# EAGLE board narsil (EAGLE 6.1)
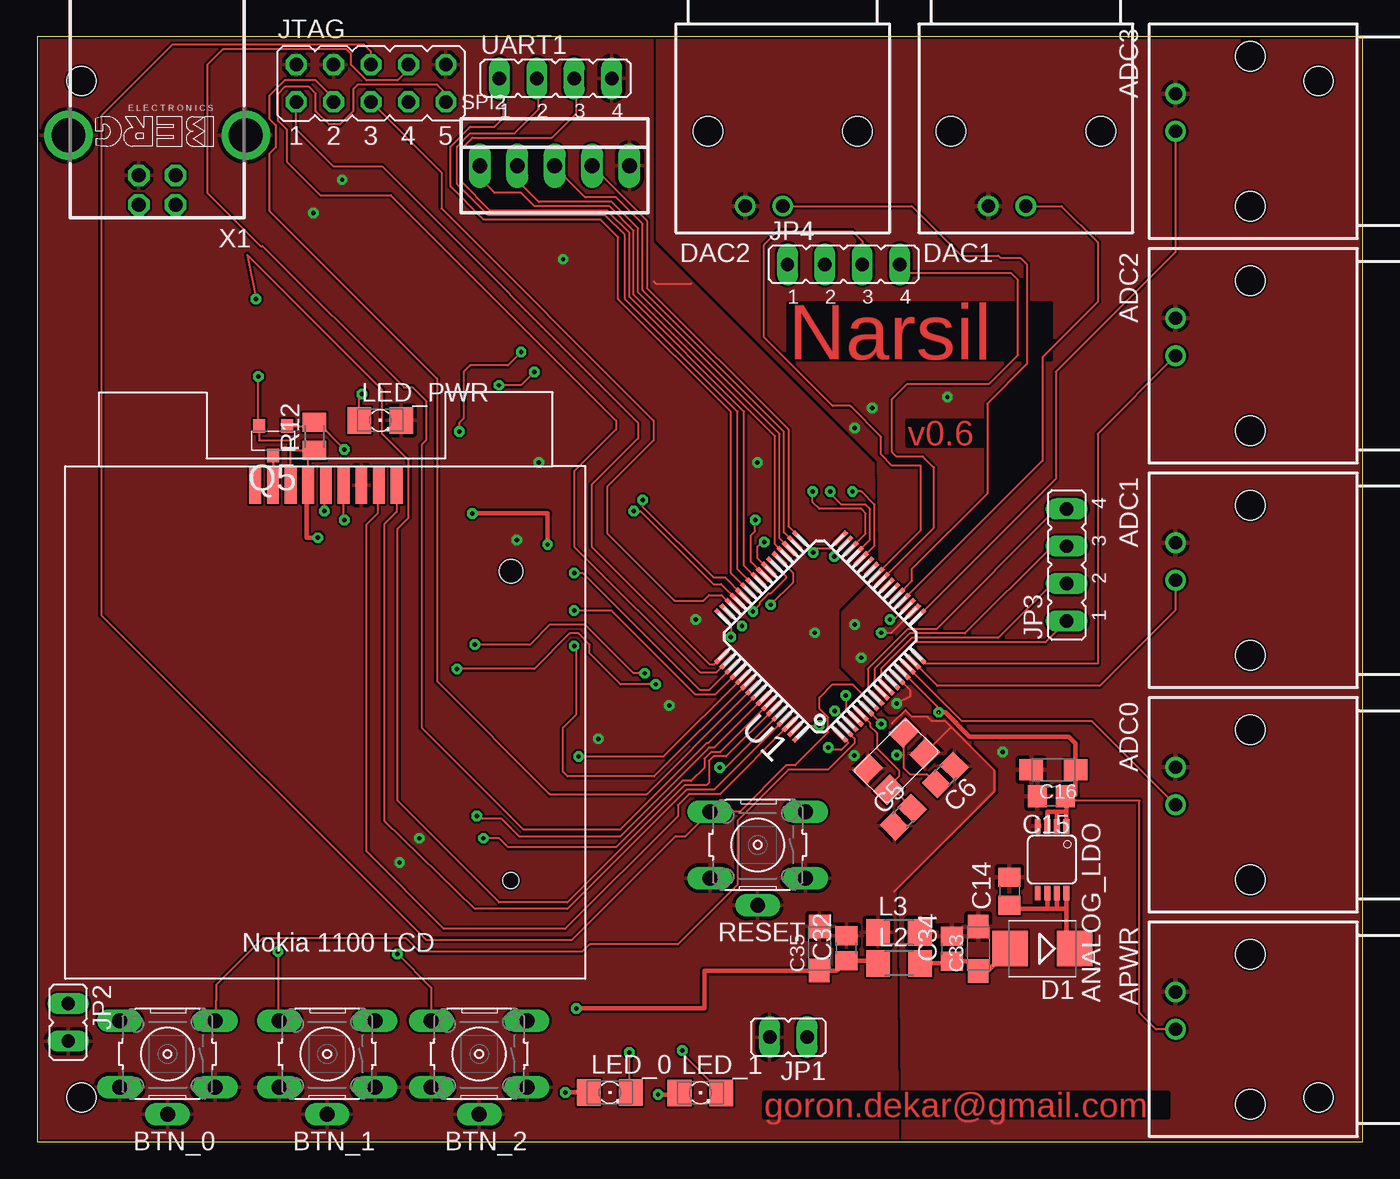
[diagram p0: board, top side]
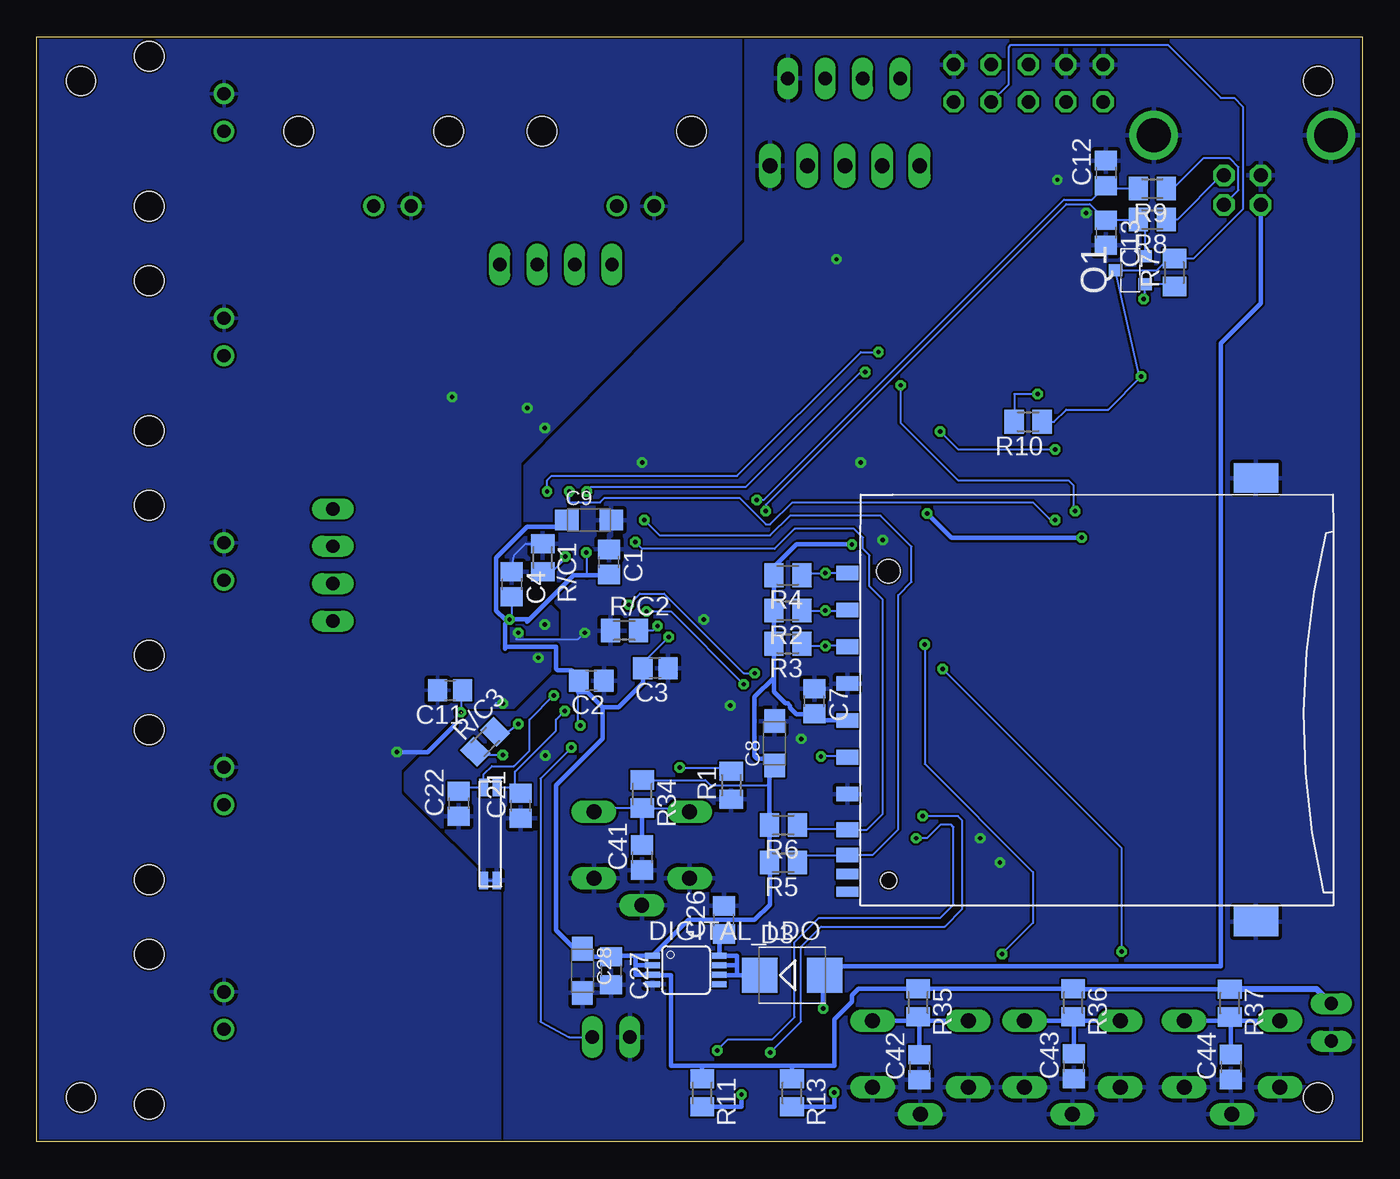
[diagram p1: board, bottom side, seen from below]

Size 90 x 75 mm. Coordinates in mm from the lower left corner, seen from the top.
Outline: 0,0 90,0 90,75 0,75 0,0
Copper layers (1*16): Top 0.035mm / dielectric 1.5mm / Bottom 0.035mm
Design rules: minimum track width 0.15mm, minimum drill 0.3mm, track to track 0.15mm, track to pad 0.15mm, pad to pad 0.15mm, via to via 0.15mm, smd to smd 0.15mm, copper to edge 0.15mm, drill to drill 8mil, minimum pad ring 10mil, minimum via ring 8mil, stop-mask expansion 4mil, vias tented up to drill 0mil, thermal gap 10mil
Holes 2 mm at 3,3 87,3 87,72 3,72

## Footprints (pad centres in the part's own frame; a part is rotated, then mirrored left to right if it is on the bottom)
AMP_227161 = drill 0.9 pad 1.27: 1 0,-5.08; 2 -2.54,-5.08 | hole 2: -5.08,0; 5.08,0
MSOP08 = smd 0.4 x 1: 1 -0.976,-2.263; 2 -0.326,-2.263; 3 0.324,-2.263; 4 0.974,-2.263; 5 0.974,2.262; 6 0.324,2.262; 7 -0.326,2.262; 8 -0.976,2.262
B3F-10XXG = drill 1.016 long: 1 -3.251,2.261; 2 3.251,2.261; 3 -3.251,-2.261; 4 3.251,-2.261; G 0,4.1
C0805 = smd 1.3 x 1.5: 1 -0.85,0; 2 0.85,0
SMC_A = smd 1.6 x 1.4: + -1.5,0; - 1.5,0
C0805' = smd 1.3 x 1.5: 1 -0.95,0; 2 0.95,0
SMB = smd 2.4 x 2.4: A 2.2,0; C -2.2,0
JP1 = drill 0.914 long: 1 0,-1.27; 2 0,1.27
JP4 = drill 0.914 long: 1 -3.81,0; 2 -1.27,0; 3 1.27,0; 4 3.81,0
JP5Q = drill 0.914 octagon: 1 -5.08,-1.27; 2 -5.08,1.27; 3 -2.54,-1.27; 4 -2.54,1.27; 5 0,-1.27; 6 0,1.27; 7 2.54,-1.27; 8 2.54,1.27; 9 5.08,-1.27; 10 5.08,1.27
R1206 = smd 1.6 x 1.803: 1 -1.422,0; 2 1.422,0
1206 = smd 1.6 x 1.803: A -1.422,0; C 1.422,0
MICRO3 = smd 0.8 x 0.9: 1 -0.95,-1; 2 0.95,-1; 3 0,1
MC146 = smd 1.2 x 0.6: GND 5.665,0.635; GND2 5.665,-0.265; P$1 -0.635,0.635; P$2 -0.635,-0.265
ACT530SMX = smd 1.6 x 1.35: P1 0.75,0.6; P2 4.25,2.6; S$1 4.25,0.6; S$2 0.75,2.6
M0805 = smd 1.3 x 1.6: 1 -0.95,0; 2 0.95,0
22-23-2051 = drill 1 long: 1 -5.08,0; 2 -2.54,0; 3 0,0; 4 2.54,0; 5 5.08,0
TQFP64 = smd 1.2 x 0.3: 1 -5.7,3.75; 2 -5.7,3.25; 3 -5.7,2.75; 4 -5.7,2.25; 5 -5.7,1.75; 6 -5.7,1.25; 7 -5.7,0.75; 8 -5.7,0.25; 9 -5.7,-0.25; 10 -5.7,-0.75; 11 -5.7,-1.25; 12 -5.7,-1.75; 13 -5.7,-2.25; 14 -5.7,-2.75; 15 -5.7,-3.25; 16 -5.7,-3.75; 33 5.7,-3.75; 34 5.7,-3.25; 35 5.7,-2.75; 36 5.7,-2.25; 37 5.7,-1.75; 38 5.7,-1.25; 39 5.7,-0.75; 40 5.7,-0.25; 41 5.7,0.25; 42 5.7,0.75; 43 5.7,1.25; 44 5.7,1.75; 45 5.7,2.25; 46 5.7,2.75; 47 5.7,3.25; 48 5.7,3.75 | smd 0.3 x 1.2: 17 -3.75,-5.7; 18 -3.25,-5.7; 19 -2.75,-5.7; 20 -2.25,-5.7; 21 -1.75,-5.7; 22 -1.25,-5.7; 23 -0.75,-5.7; 24 -0.25,-5.7; 25 0.25,-5.7; 26 0.75,-5.7; 27 1.25,-5.7; 28 1.75,-5.7; 29 2.25,-5.7; 30 2.75,-5.7; 31 3.25,-5.7; 32 3.75,-5.7; 49 3.75,5.7; 50 3.25,5.7; 51 2.75,5.7; 52 2.25,5.7; 53 1.75,5.7; 54 1.25,5.7; 55 0.75,5.7; 56 0.25,5.7; 57 -0.25,5.7; 58 -0.75,5.7; 59 -1.25,5.7; 60 -1.75,5.7; 61 -2.25,5.7; 62 -2.75,5.7; 63 -3.25,5.7; 64 -3.75,5.7
SD-RSMT-2-MQ = smd 1 x 1.5: 1 6.88,26.25; 2 4.38,26.25; 3 1.88,26.25; 4 -0.62,26.25; 5 -3.12,26.25; 6 -5.62,26.25; 7 -8.05,26.25; 8 -9.75,26.25; 9 9.38,26.25 | smd 0.7 x 1.5: CD -11.05,26.25; WP -12.25,26.25 | smd 2 x 3: GP -14.28,-1.5; GP2 15.82,-1.5 | hole 1.1: -11.5,23.45 | hole 1.6: 9.5,23.45
LCD_NOKIA1100 = smd 0.8 x 2.5: P$1 0.4,-0.1; P$2 1.6,-0.1; P$3 2.8,-0.1; P$4 4,-0.1; P$5 5.2,-0.1; P$6 6.4,-0.1; P$7 7.6,-0.1; P$8 8.8,-0.1; P$9 10,-0.1
PN61729-S = drill 0.95 octagon: 1 1.25,4.71; 2 -1.25,4.71; 3 -1.25,2.71; 4 1.25,2.71 | drill 2.3 pad 2.9: SHLD@1 -6.02,0; SHLD@2 6.02,0

## Placement (x,y rotation side)
ADC0  1-227161-6  [AMP_227161]  82.37,22.87 270 top
ADC1  1-227161-6  [AMP_227161]  82.37,38.11 270 top
ADC2  1-227161-6  [AMP_227161]  82.37,53.35 270 top
ADC3  1-227161-6  [AMP_227161]  82.37,68.59 270 top
ANALOG_LDO  ADP3335ARM-3.3RL7  [MSOP08]  68.9,19.14 180 top
APWR  1-227161-6  [AMP_227161]  82.37,7.63 270 top
BTN_0  10-XXG  [B3F-10XXG]  8.84,5.96 180 top
BTN_1  10-XXG  [B3F-10XXG]  19.68,5.96 180 top
BTN_2  10-XXG  [B3F-10XXG]  30,5.96 180 top
C1  [C0805]  51.15,39.35 270 bottom
C2  [C0805]  52.35,31.3 180 bottom
C3  [C0805]  48,32.15 180 bottom
C4  [C0805]  57.75,37.85 270 bottom
C5  [C0805]  58.8,22.03 45 top
C6  [C0805]  61.66,24.89 225 top
C7  [C0805]  37.2,29.9 270 bottom
C8  [SMC_A]  39.9,27.05 90 bottom
C9  [SMC_A]  52.5,42.2 0 bottom
C11  [C0805]  61.93,30.64 180 bottom
C12  [C0805]  17.4,65.75 90 bottom
C13  [C0805]  17.4,61.7 270 bottom
C14  100n  [C0805']  66.02,17 90 top
C15  100u  [C0805']  68.85,23.45 180 top
C16  [SMC_A]  69,25.25 180 top
C21  [C0805]  57.15,22.8 90 bottom
C22  [C0805]  61.35,22.95 90 bottom
C26  100n  [C0805']  43.35,15.05 90 bottom
C27  100u  [C0805']  51,11.6 270 bottom
C28  [SMC_A]  52.95,11.6 270 bottom
C32  100n  [C0805]  54.94,13.13 90 top
C33  [SMC_A]  63.9,13.1 90 top
C34  100n  [C0805]  62.1,13.1 90 top
C35  [SMC_A]  53.1,13.11 90 top
C41  [C0805]  48.9,19.29 90 bottom
C42  [C0805]  30.06,5.06 90 bottom
C43  [C0805]  19.59,5.12 90 bottom
C44  [C0805]  8.91,5.07 90 bottom
D1  [SMB]  68.25,13.11 180 top
D3  [SMB]  38.7,11.3 0 bottom
DAC1  1-227161-6  [AMP_227161]  67.13,68.59 0 top
DAC2  1-227161-6  [AMP_227161]  50.62,68.59 0 top
DIGITAL_LDO  ADP3335ARM-3.3RL7  [MSOP08]  45.92,11.65 270 bottom
JP1  [JP1]  51,7.1 90 top
JP2  [JP1]  2.1,8.1 180 top
JP3  [JP4]  69.9,39.15 90 top
JP4  [JP4]  54.75,59.55 0 top
JTAG  [JP5Q]  22.66,71.85 0 top
L2  [R1206]  58.53,12.11 0 top
L3  [R1206]  58.51,14.21 0 top
LED_0  [1206]  38.88,3.34 0 top
LED_1  [1206]  45.03,3.32 0 top
LED_PWR  [1206]  23.29,48.96 0 top
Q1  IRLML5203  [MICRO3]  15.75,59.15 90 bottom
Q2  32kHz  [MC146]  59.4,23.4 270 bottom
Q5  IRLML5203  [MICRO3]  16.01,47.58 180 top
QF1  ACT530SMX  [ACT530SMX]  58.96,28.73 225 top
R1  5k  [M0805]  42.85,24.2 90 bottom
R2  47k  [M0805]  39,36.05 180 bottom
R3  47k  [M0805]  39,33.8 180 bottom
R4  47k  [M0805]  39,38.45 180 bottom
R5  47k  [M0805]  39.3,18.95 180 bottom
R6  47k  [M0805]  39.3,21.5 180 bottom
R7  10K  [M0805]  12.75,59 90 bottom
R8  47k  [M0805]  14.25,62.6 180 bottom
R9  47k  [M0805]  14.25,64.7 180 bottom
R10  5k  [M0805]  22.68,48.87 180 bottom
R11  5k  [M0805]  44.82,3.32 270 bottom
R12  10K  [M0805]  18.81,47.88 90 top
R13  5k  [M0805]  38.72,3.32 270 bottom
R34  5k  [M0805]  48.88,23.6 270 bottom
R35  5k  [M0805]  30.15,9.44 270 bottom
R36  5k  [M0805]  19.62,9.44 270 bottom
R37  5k  [M0805]  8.99,9.41 270 bottom
R/C1  [M0805]  55.65,39.65 270 bottom
R/C2  [M0805]  50.1,34.7 0 bottom
R/C3  [M0805]  59.55,27.15 45 bottom
RESET  10-XXG  [B3F-10XXG]  48.92,20.15 180 top
SPI2  22-23-2051  [22-23-2051]  35.13,66.25 0 top
U1  STM32F10XRXT6  [TQFP64]  53.16,34.3 135 top
U$1  SD-RSMT-2-MQ  [SD-RSMT-2-MQ]  8.71,29.22 90 bottom
U$2  LCD  [LCD_NOKIA1100]  24.8,44.46 180 top
UART1  [JP4]  35.19,72.18 0 top
X1  PN61729-S  [PN61729-S]  8.14,68.31 180 top

## Library data of the parts
ADC0 ADC1-ADC3 APWR DAC1 DAC2 = con-coax; MF: TYCO ELECTRONICS; MPN: 1-227161-6; OC_FARNELL: unknown; OC_NEWARK: 09H7854
ANALOG_LDO DIGITAL_LDO = analog-devices
BTN_0 BTN_1 BTN_2 RESET = switch-omron
C1-C9 C11-C13 C16 C21 C22 C28 C32-C35 C41-C44 L2 L3 R1-R13 R34-R37 R/C1-R/C3 = resistor
C14 C15 C26 C27 = rcl
D1 D3 = diode
JP1-JP4 JTAG UART1 = jumper
LED_0 LED_1 LED_PWR = led
Q1 Q5 = transistor-power
Q2 QF1 = crystal
SPI2 = con-molex; MF: MOLEX; MPN: 22-23-2051; OC_FARNELL: 1462952; OC_NEWARK: 38C9178
U1 = stm32
U$1 = SD-RSMT-2-MQ
U$2 = nokia_lcd
X1 = con-berg; OC_FARNELL: unknown; OC_NEWARK: unknown

## Nets
+5V: C32.1 C35.+ D3.A L2.1 X1.1
A6: U1.22
AGND: ADC0.2 ADC1.2 ADC2.2 ADC3.2 ANALOG_LDO.4 APWR.2 C11.2 C14.2 C15.2 C16.- C33.- C34.2 DAC1.2 DAC2.2 L3.2 U1.12
GND: BTN_0.1 BTN_0.2 BTN_0.G BTN_1.1 BTN_1.2 BTN_1.G BTN_2.1 BTN_2.2 BTN_2.G C1.1 C2.1 C3.1 C4.1 C5.1 C6.1 C7.1 C8.- C9.- C12.2 C13.2 C21.1 C22.1 C26.2 C27.2 C28.- C32.2 C35.- C41.1 C42.1 C43.1 C44.1 DIGITAL_LDO.4 JP1.2 JP2.2 JTAG.2 JTAG.4 JTAG.10 L3.1 LED_PWR.C Q2.GND Q2.GND2 QF1.S$1 QF1.S$2 R1.1 R/C1.1 R/C2.1 RESET.1 RESET.2 RESET.G SPI2.5 U1.18 U1.63 U$1.3 U$1.6 U$1.GP U$1.GP2 U$2.P$3 UART1.4 X1.4 X1.SHLD@1 X1.SHLD@2
N$1: R/C2.2 U1.47
N$2: R/C1.2 U1.31
N$3: C5.2 QF1.P2 U1.5
N$4: C6.2 QF1.P1 R/C3.1
N$5: DAC1.1 U1.20
N$6: DAC2.1 U1.21
N$7: ADC3.1 U1.17
N$8: ADC2.1 U1.16
N$9: ADC1.1 U1.15
N$10: ADC0.1 U1.14
N$11: R1.2 U1.60
N$12: Q5.3 U$2.P$8
N$13: LED_PWR.A R10.2
N$14: R9.1 X1.2
N$15: LED_1.A R11.2
N$16: R8.1 X1.3
N$17: LED_0.A R13.2
N$18: U$1.WP
N$19: U$1.CD
N$20: JP1.1 U1.1
N$21: ANALOG_LDO.6 ANALOG_LDO.7 ANALOG_LDO.8 C14.1 D1.C
N$22: R/C3.2 U1.6
N$23: C33.+ C34.1 D1.A L2.2
N$28: C41.2 JTAG.6 R34.2 RESET.3 RESET.4 U1.7
N$32: C26.1 D3.C DIGITAL_LDO.6 DIGITAL_LDO.7 DIGITAL_LDO.8
PA7: U1.23
PA8: U1.41 UART1.3
PA9: U1.42 UART1.2
PA10: U1.43 UART1.1
PA11: C12.1 R9.2 U1.44
PA12: C13.1 Q1.2 R8.2 U1.45
PA13: JTAG.5 U1.46
PA14: JTAG.1 U1.49
PA15: JTAG.9 U1.50
PB0: U1.26
PB1: U1.27
PB2: Q5.1 R12.2 U1.28
PB3: JTAG.3 U1.55
PB4: JTAG.8 U1.56
PB5: LED_0.C U1.57
PB6: LED_1.C U1.58
PB7: Q1.1 R7.1 U1.59
PB8: U1.61 U$2.P$1
PB9: U1.62 U$2.P$2
PB10: U1.29 U$2.P$4
PB11: U1.30 U$2.P$5
PB12: SPI2.4 U1.33
PB13: SPI2.3 U1.34
PB14: SPI2.2 U1.35
PB15: SPI2.1 U1.36
PC0: JP3.4 U1.8
PC1: JP3.3 U1.9
PC2: JP3.2 U1.10
PC3: JP3.1 U1.11
PC4: JP4.4 U1.24
PC5: JP4.3 U1.25
PC6: BTN_2.3 BTN_2.4 C42.2 R35.2 U1.37
PC7: BTN_1.3 BTN_1.4 C43.2 R36.2 U1.38
PC8: R6.1 U1.39 U$1.7
PC9: R5.1 U1.40 U$1.8
PC10: R4.1 U1.51 U$1.9
PC11: R2.1 U1.52 U$1.1
PC12: U1.53 U$1.5
PC13: BTN_0.3 BTN_0.4 C44.2 R37.2 U1.2
PC14: C21.2 Q2.P$1 U1.3
PC15: C22.2 Q2.P$2 U1.4
PD2: R3.1 U1.54 U$1.2
VCC: C1.2 C2.2 C3.2 C4.2 C7.2 C8.+ C9.+ C27.1 C28.+ DIGITAL_LDO.1 DIGITAL_LDO.2 DIGITAL_LDO.3 JP2.1 JTAG.7 Q1.3 Q5.2 R2.2 R3.2 R4.2 R5.2 R6.2 R7.2 R10.1 R11.1 R12.1 R13.1 R34.1 R35.1 R36.1 R37.1 U1.19 U1.32 U1.48 U1.64 U$1.4 U$2.P$6 U$2.P$7
VDD: ANALOG_LDO.1 ANALOG_LDO.2 ANALOG_LDO.3 APWR.1 C11.1 C15.1 C16.+ U1.13

## Tracks (layer width: path | path; a pad name or v marks a point on that pad's centre or on a via)
+5V  (via drill 0.3)
  Top 0.3: L2.1 56.94,12.28 C32.1 54.27,11.61 C35.+ 45.3,11.6 45.3,9.05 v36.6,9.05
  Bottom 0.3: v36.6,9.05 36.6,11.3 D3.A 35.9,11.9 9.6,11.9 9.6,54.2 6.89,56.91 X1.1
AGND  (via drill 0.3)
  Top 0.15: U1.12 59.25,30.68 59.25,30.2 v58.35,29.75
  Bottom 0.15: v58.35,29.75 58.82,29.77
  Bottom 0.3: 61.65,28.25 63.45,26.45 v65.55,26.45
  other vias: 56.7,49.8 55.95,32.85 55.5,35.1 61.8,50.55 55.5,48.45
  pour Top: 42.15,76.85 42.15,61.25 57.15,46.25 57.3,38.45 54.75,35.9 54.75,32.3 57.9,29.15 61.65,29.15 65.4,25.4 65.4,23.6 58.65,16.85 58.8,-0.1 90.15,-0.1 90.15,76.85
  pour Bottom: 42.15,76.85 90.15,76.85 90.15,-0.1 58.5,-0.1 58.5,16.85 65.25,23.6 65.25,25.25 61.05,29.45 57.6,29.45 54.6,32.45 54.6,35.9 57.15,38.45 57.15,46.1 42.15,61.25
GND  (via drill 0.3)
  Top 0.15: QF1.S$2 62.01,28.1 62.1,28.1 | 58.05,28.4 58.95,29.3 59.4,28.85 60.45,28.85 60.75,28.55 61.65,28.55 64.95,25.25 64.95,23.75 58.2,17 | 41.85,58.4 42,58.25 44.4,58.25 | v57.3,34.55 58.01,34.55 U1.18
  Bottom 0.15: v57.3,34.55 57.45,34.1 53.25,34.1 v52.8,34.55 | C4.1 57.6,39.8 56.8,40.6 R/C1.1 | Q2.GND2 Q2.GND
  Bottom 0.3: 51,10.68 C27.2 | 52.95,10.65 C28.-
  other vias: 24.6,18.95 25.95,20.6 44.7,35.45 42.9,29.6 38.1,27.35 48.9,46.1 18.75,63.05 35.7,59.9 20.7,65.3 32.55,40.85 34.05,46.1 55.48,26.2
  pour Bottom (rank 6): 0,77 90.15,76.85 90.15,-0.1 0,0.05
  pour Top (rank 6): 0,77 90.15,76.85 90.15,-0.1 0,0.05
N$1  (via drill 0.3)
  Top 0.15: v47.85,35 47.85,35.01 U1.47
  Bottom 0.15: v47.85,35 48.15,34.7 R/C2.2
N$2  (via drill 0.3)
  Top 0.15: U1.31 54.06,39.8 54.06,39.68 v54.11,39.72
  Bottom 0.15: v54.11,39.72 54.11,39.59 55.15,38.55 R/C1.2
N$3
  Top 0.15: 58.5,24.8 57.79,24.09 QF1.P2 58.15,23.89 C5.2 | U1.5 56.55,28.43 56.55,28.2 57,27.75 57,26.7 58.5,25.2 58.5,24.8 | 58.5,24.8 arc-90 58.5,24.8
N$4  (via drill 0.3)
  Top 0.15: 57.89,27.8 58.88,27.8 | 58.85,26.25 58.85,25.35 59.25,24.95 60.4,24.95 C6.2 | 58.85,26.25 QF1.P1 58.88,27.8 | 58.95,27.8 58.88,27.8 | v58.35,26.25 58.85,26.25
  Bottom 0.15: R/C3.1 arc-90 59.99,26.25 v58.35,26.25
N$5
  Top 0.15: U1.20 68.25,46.21 68.25,53.25 72,57 72,61.05 69.54,63.51 DAC1.1
N$6
  Top 0.15: DAC2.1 59.39,63.51 62.75,60.15 65.25,60.15 65.4,60 66.75,60 67.2,59.55 67.2,52.8 64.5,50.1 64.5,44 59.4,38.9 59.4,38.06 U1.21
N$7
  Top 0.15: ADC3.1 77.29,60.39 69.15,52.25 69.15,44.99 U1.17
N$8
  Top 0.15: ADC2.1 72,48.05 72,32.45 60.31,32.45 U1.16
N$9
  Top 0.15: ADC1.1 77.29,36.09 72.15,30.95 61.11,30.95 U1.15
N$10
  Top 0.15: ADC0.1 71.61,28.55 62.8,28.55 U1.14
N$11  (via drill 0.3)
  Top 0.15: U1.60 46.73,25.4 v46.35,25.4
  Bottom 0.15: v46.35,25.4 43.1,25.4 arc90 R1.2
N$12
  Top 0.15: Q5.3 U$2.P$8
N$13  (via drill 0.3)
  Top 0.15: LED_PWR.A 21.87,50.57 v22.05,50.75
  Bottom 0.15: v22.05,50.75 23.63,50.75 R10.2
N$14
  Bottom 0.15: 13.1,64.5 R9.1 12.85,64.7 10.8,66.75 9,66.75 8.4,66.15 8.4,64.59 X1.2
N$15  (via drill 0.3)
  Top 0.3: v42.15,3.2 43.61,3.2 LED_1.A
  Bottom 0.3: R11.2 42.15,2.37 v42.15,3.2
N$16
  Bottom 0.15: 13.25,62.55 R8.1 12.55,62.6 9.55,65.6 X1.3
N$17  (via drill 0.3)
  Top 0.3: v35.85,3.35 LED_0.A
  Bottom 0.3: R13.2 35.85,2.37 v35.85,3.35
N$20  (via drill 0.3)
  Top 0.15: U1.1 55.05,27.11 55.05,27.05 54.6,26.6 53.85,26.6 v53.7,26.75
  Bottom 0.15: v53.7,26.75 55.8,24.65 55.8,8.15 53.85,7.1 JP1.1
N$21
  Top 0.3: ANALOG_LDO.8 69.88,15.8 | 69.88,15.8 69.23,15.8 | 69.23,15.8 68.58,15.8 | ANALOG_LDO.6 68.58,15.8 | ANALOG_LDO.7 69.23,15.8 | 69.88,15.8 69.88,13.11 D1.C | 68.58,15.8 66.27,15.8 arc-90 C14.1
N$22  (via drill 0.3)
  Top 0.15: U1.6 57.19,28.5 v57.3,28.35
  Bottom 0.15: v57.3,28.35 57.98,27.82 R/C3.2
N$23
  Top 0.3: D1.A 64.54,11.6 C33.+ 63.25,12.25 C34.1 61.96,12.11 L2.2
N$28
  Top 0.15: JTAG.6 22.66,73.99 22.2,74.45 9.15,74.45 4.35,69.65 4.35,35.75 26.4,13.7 36.3,13.7 43.35,20.75 44.01,20.75 RESET.4 47.71,22.41 50.85,25.55 51.45,25.55 53.7,27.8 53.7,28.8 53.1,29.4 53.1,30.15 54,31.05 55.35,31.05 U1.7
  Bottom 0.15: RESET.3 51.93,22.65 R34.2 45.91,22.65 RESET.4
  Bottom 0.3: C41.2 48.9,22.63 R34.2
N$32
  Bottom 0.15: DIGITAL_LDO.8 43.66,12.64 43.65,12.65
  Bottom 0.3: D3.C 42.45,11.3 | 42.45,11.3 43.66,11.3 DIGITAL_LDO.6 | DIGITAL_LDO.7 42.45,11.98 | 42.45,11.98 42.45,11.3 | DIGITAL_LDO.8 42.45,12.63 42.45,11.98 | C26.1 43.65,14.1 43.65,12.65
PA8
  Top 0.15: U1.41 48,39.11 48,49.55 40.2,57.35 40.2,61.7 38.7,63.2 30.75,63.2 28.8,65.15 28.8,67.4 29.55,68.15 34.95,68.15 36.6,69.8 36.6,72.04 UART1.3
PA9
  Top 0.15: U1.42 47.55,38.85 47.55,49.55 39.9,57.2 39.9,61.55 38.55,62.9 30.6,62.9 28.5,65 28.5,67.55 29.4,68.45 32.4,68.45 34.05,70.1 34.05,72.05 UART1.2
PA10
  Top 0.15: U1.43 47.1,38.59 47.1,49.55 39.45,57.2 39.45,61.4 38.25,62.6 30.3,62.6 28.05,64.85 28.05,67.55 29.4,68.9 31.05,68.9 31.65,69.5 31.65,71.91 UART1.1
PA11  (via drill 0.3)
  Top 0.15: v41.1,43.55 41.1,43.1 45.9,38.3 46.69,38.3 U1.44
  Bottom 0.15: R9.2 16.8,64.7 17,64.9 C12.1 18.35,63.95 20.25,63.95 40.65,43.55 v41.1,43.55
PA12  (via drill 0.3)
  Top 0.15: v40.5,42.8 40.95,42.8 45.9,37.85 46.43,37.85 U1.45
  Bottom 0.15: Q1.2 14.75,62.15 R8.2 15.25,62.55 C13.1 18.5,63.65 20.1,63.65 40.5,43.25 v40.5,42.8
PA13
  Top 0.15: U1.46 46.47,37.1 45.6,37.1 45.23,36.73 43.27,36.73 38.7,41.3 38.7,44.45 41.85,47.6 41.85,48.95 27.45,63.35 27.45,65.79 JTAG.5
PA14
  Top 0.15: U1.49 45.95,32.4 45.65,32.4 37.65,40.4 37.65,44.6 40.8,47.75 40.8,48.8 23.4,66.2 20.1,66.2 17.55,68.75 17.55,70.55 JTAG.1
PA15
  Top 0.15: JTAG.9 27.74,71.16 27.15,71.75 21.75,71.75 21.45,71.45 21.45,69.95 20.55,69.05 19.8,69.05 18.9,69.95 18.9,71.15 18.45,71.6 16.8,71.6 16.35,71.15 16.35,69.3 16.95,68.7 16.95,66.5 19.2,64.25 24,64.25 39.3,48.95 39.3,48.35 36.45,45.5 36.45,40.4 45,31.85 46.11,31.85 U1.50
PB2  (via drill 0.3)
  Top 0.15: Q5.1 18.81,48.58 R12.2 19.02,48.83 v20.85,47 | U1.28 56.85,40.47 56.85,43.25 55.95,44.15 v55.35,44.15 | v32.85,53.6 31.95,52.7 29.4,52.7 28.95,52.25 28.95,49.1 28.65,48.8 v28.65,48.2
  Bottom 0.15: v55.35,44.15 55.35,44.9 55.05,45.2 42.45,45.2 34.05,53.6 v32.85,53.6 | v28.65,48.2 27.45,47 v20.85,47
PB3
  Top 0.15: U1.55 47.55,29.75 41.4,23.6 34.8,23.6 27.15,31.25 27.15,51.8 15.75,63.2 15.75,67.05 16.2,67.5 16.2,69 15.75,69.45 15.75,71 16.8,72.05 18.9,72.05 20.12,70.83 JTAG.3
PB4
  Top 0.15: JTAG.8 25.2,72.8 24.45,72.05 22.35,72.05 21.3,73.1 21.3,73.85 21,74.15 12.6,74.15 11.55,73.1 11.55,64.4 15.15,60.8 15.3,60.8 24.9,51.2 25.5,51.2 26.4,50.3 26.4,47.6 26.1,47.3 26.1,28.1 33,21.2 39.6,21.2 45.45,27.05 45.56,27.05 U1.56
PB5  (via drill 0.3)
  Top 0.15: U1.57 45.96,26.75 45.6,26.75 39.6,20.75 32.7,20.75 31.5,21.95 30,21.95 v29.85,22.1 | LED_0.C 40.2,3.44 v40.2,6.05
  Bottom 0.15: v40.2,6.05 38.1,8.15 38.1,13.25 36.75,14.6 28.35,14.6 27.15,15.8 27.15,21.8 27.45,22.1 v29.85,22.1
PB6  (via drill 0.3)
  Top 0.15: U1.58 46.37,26.45 45.75,26.45 45.3,26 45.3,25.4 44.4,24.5 43.8,24.5 39.3,20 31.95,20 31.35,20.6 v30.3,20.6 | LED_1.C 43.8,5.97 v43.8,6.2
  Bottom 0.15: v43.8,6.2 43.05,6.95 40.05,6.95 38.55,8.45 38.55,13.55 36.9,15.2 28.65,15.2 27.75,16.1 27.75,21.35 27.9,21.5 28.65,21.5 29.55,20.6 v30.3,20.6
PB7  (via drill 0.3)
  Top 0.15: U1.59 46.78,26.15 45.9,26.15 45.6,25.85 45.6,24.35 45.45,24.2 43.95,24.2 36,16.25 31.35,16.25 24.45,23.15 24.45,41.6 25.2,42.35 25.2,46.25 23.4,48.05 23.4,51.05 14.25,60.2 v14.85,57.2
  Bottom 0.15: R7.1 12.9,58.2 Q1.1 14.75,57.65 v14.85,57.2
PB8
  Top 0.15: U1.61 45.94,23.9 44.1,23.9 36,15.8 29.7,15.8 23.55,21.8 23.55,41.9 24.4,42.75 U$2.P$1
PB9
  Top 0.15: U1.62 46.35,23.6 44.25,23.6 43.5,22.85 43.5,22.1 35.85,14.45 27.6,14.45 22.35,19.7 22.35,41.9 23.1,42.65 23.1,44.56 U$2.P$2
PB10  (via drill 0.3)
  Top 0.15: U1.29 56.55,40.87 56.55,42.95 56.25,43.25 54.6,43.25 53.85,44 v53.85,44.15 | v20.85,42.2 20.8,42.25 U$2.P$4
  Bottom 0.15: v53.85,44.15 53.85,43.4 51.75,43.4 51.45,43.7 42.3,43.7 40.5,41.9 40.2,41.9 38.7,43.4 22.35,43.4 21.15,42.2 v20.85,42.2
PB11  (via drill 0.3)
  Top 0.15: U1.30 56.25,41.28 56.25,42.65 55.95,42.95 53.1,42.95 52.65,43.4 v52.65,44.15 | v33.75,52.25 32.85,51.35 v31.35,51.35 | v19.5,42.8 19.5,44.46 U$2.P$5
  Top 0.3: U$2.P$5 19.65,44.51 19.65,44.15
  Bottom 0.15: v52.65,44.15 52.35,44.45 41.85,44.45 34.05,52.25 v33.75,52.25 | v31.35,51.35 31.35,48.8 27.45,44.9 19.94,44.9 U$2.P$5 19.6,42.9 v19.5,42.8
PB12
  Top 0.15: SPI2.4 41.4,62.52 41.4,57.95 51,48.35 51,41.76 U1.33
PB13
  Top 0.15: U1.34 50.7,41.36 50.7,48.2 41.1,57.8 41.1,62.3 39.3,64.1 37.2,64.1 35.13,66.17 SPI2.3
PB14
  Top 0.15: U1.35 50.4,40.95 50.4,48.05 40.8,57.65 40.8,62 39,63.8 34.05,63.8 32.59,65.26 SPI2.2
PB15
  Top 0.15: U1.36 50.1,40.54 50.1,47.9 40.5,57.5 40.5,61.85 38.85,63.5 33.75,63.5 32.85,64.4 31.05,64.4 30.05,65.4 SPI2.1
PC0
  Top 0.15: JP3.4 69.69,42.75 69,42.75 61.05,34.8 59.1,34.8 56.4,32.1 56.4,30.71 U1.8
PC1
  Top 0.15: JP3.3 69.83,40.35 68.85,40.35 63,34.5 59.25,34.5 56.85,32.1 56.85,30.96 U1.9
PC2
  Top 0.15: JP3.2 69.67,37.65 68.7,37.65 65.25,34.2 59.4,34.2 57.3,32.1 57.3,31.22 U1.10
PC3
  Top 0.15: JP3.1 68.46,33.9 59.55,33.9 57.6,31.95 57.6,31.63 U1.11
PC4
  Top 0.15: U1.24 60.9,41.69 60.9,45.75 60.15,46.5 58.35,46.5 58.05,46.8 58.05,50.4 59.1,51.45 64.65,51.45 66.6,53.4 66.6,58.5 66.15,58.95 58.56,58.95 JP4.4
PC5
  Top 0.15: U1.25 60,41.49 60,45.9 58.05,45.9 57.3,46.65 57.3,47.85 55.2,49.95 54,49.95 49.35,54.6 49.35,60.9 50.25,61.8 55.35,61.8 56.02,61.13 JP4.3
PC6  (via drill 0.3)
  Top 0.15: U1.37 51.3,38.63 51.3,37.95 v49.8,36.45 | v41.25,31.8 40.5,31.8 37.2,35.1 34.8,35.1 33.45,33.75 v29.7,33.75 | v24.45,12.75 26.75,10.45 BTN_2.4
  Bottom 0.15: v49.8,36.45 49.05,37.2 47.4,37.2 42,31.8 v41.25,31.8 | v29.7,33.75 29.7,25.65 22.35,18.3 22.35,14.85 v24.45,12.75
  Bottom 0.3: BTN_2.4 29.88,8.22 R35.2 | C42.2 30.06,8.4 R35.2 | BTN_2.3 30.42,8.22 R35.2
PC7  (via drill 0.3)
  Top 0.15: U1.38 50.85,38.38 50.85,38.25 49.8,37.2 49.65,37.2 49.05,36.6 49.05,36.45 v48.6,36 | v42,31.05 39.6,31.05 37.5,33.15 37.5,33.75 36.75,34.5 36.15,34.5 33.75,32.1 v28.5,32.1 | BTN_1.4 16.35,8.3 v16.35,12.9
  Bottom 0.15: v48.6,36 46.95,36 v42,31.05 | v28.5,32.1 16.35,19.95 v16.35,12.9
  Bottom 0.3: BTN_1.4 19.35,8.22 R36.2 | BTN_1.3 19.89,8.22 R36.2 | C43.2 19.59,8.46 R36.2
PC8  (via drill 0.3)
  Top 0.15: U1.39 48.9,39.62 48.9,40.4 49.2,40.7 v49.35,40.7
  Bottom 0.15: 38.35,21.17 R6.1 38.05,21.2 34.99,21.2 U$1.7 33.63,21.17 32.55,22.25 32.55,36.8 33.45,37.7 33.45,39.8 33.9,40.25 33.9,41 34.5,41.6 38.55,41.6 39.9,40.25 48.9,40.25 v49.35,40.7
PC9  (via drill 0.3)
  Top 0.15: U1.40 48.45,39.36 48.45,41.15 48.75,41.45 v48.75,42.2
  Bottom 0.15: R5.1 38.35,19.47 38.28,19.4 35.03,19.4 U$1.8 33.23,19.47 31.5,21.2 31.5,37.1 30.6,38 30.6,40.4 32.7,42.5 38.85,42.5 40.2,41.15 47.7,41.15 v48.75,42.2
PC10  (via drill 0.3)
  Top 0.15: U1.51 45.62,30.65 45,30.65 37.05,38.6 v36.45,38.6
  Bottom 0.15: 38.05,38.6 R4.1 37.9,38.6 v36.45,38.6 U$1.9
PC11  (via drill 0.3)
  Top 0.15: U1.52 46.03,30.35 44.7,30.35 39,36.05 v36.45,36.05
  Bottom 0.15: 37.95,36.1 37.95,36.05 R2.1 | R2.1 38.1,36.05 | R2.1 v36.45,36.05 34.95,36.05 34.96,36.06 U$1.1
PC12  (via drill 0.3)
  Top 0.15: v36.75,26.15 42.53,26.15 U1.53
  Bottom 0.15: U$1.5 35.01,26.15 v36.75,26.15
PC13
  Top 0.15: U1.2 55.5,27.36 55.5,27.05 53.7,25.25 51,25.25 47.55,21.8 47.55,17.45 43.5,13.4 37.5,13.4 37,12.9 25.95,12.9 25.05,13.8 15.3,13.8 12.15,10.65 12.15,9.75 12.15,9.6 12.15,8.28 BTN_0.3
  Bottom 0.3: C44.2 8.91,8.38 R37.2 8.75,8.22 | BTN_0.4 8.75,8.22 | 8.75,8.22 BTN_0.3
PC14  (via drill 0.3)
  Top 0.15: U1.3 54.32,29.25 v54.15,29.25
  Bottom 0.15: C21.2 57.53,24.04 | 57.53,24.04 Q2.P$1 | 57.53,24.04 57.53,25.11 54.75,27.9 54.75,28.65 v54.15,29.25
PC15  (via drill 0.3)
  Top 0.15: 55.6,28.7 U1.4 54.9,29.38 v54.9,30.3
  Bottom 0.15: C22.2 61.35,24.04 Q2.P$2 59.66,24.93 59.1,25.5 57.6,25.5 56.55,26.55 56.55,28.65 v54.9,30.3
PD2  (via drill 0.3)
  Top 0.15: U1.54 41.89,24.8 36,24.8 35.7,25.1 35.7,28.1 36.6,29 36.6,33.5 v36.45,33.65
  Bottom 0.15: 38.05,33.6 R3.1 37.9,33.65 v36.45,33.65 35.01,33.65 U$1.2
VCC  (via drill 0.3)
  Top 0.15: U1.48 47.1,35.06 v47.1,34.25 | U1.32 53.81,40.25 52.93,40.25 v52.68,40 | U1.64 52.41,28.25 v53.1,28.25 | U$2.P$7 17.2,46.93 | 17.2,46.93 R12.1 18.4,46.93 U$2.P$6 | 17.2,46.93 17.2,47.6 15.06,47.6 Q5.2 15,48.58 v15,51.95 | U1.19 58.2,35.45 v57.9,35.45
  Top 0.3: v34.65,40.55 34.65,42.65 v29.55,42.65 | U$2.P$6 18.3,44.56 18.3,41 v19.05,41
  Bottom 0.15: v53.1,28.25 53.25,28.4 53.25,30.5 | R34.1 44.6,24.55 44.25,24.2 40.4,24.2 40.25,24.35 | R7.2 13.15,59.95 13.95,59.15 Q1.3 16.8,59.15 15.15,51.95 v15,51.95 17.25,49.7 20.1,49.7 20.93,48.87 R10.1 | JTAG.7 24,71.78 24,74.3 23.85,74.45 13.2,74.45 9.6,70.85 8.7,70.85 8.1,70.25 8.1,66.35 | 12.75,60.35 R7.2 | v47.1,34.25 48.9,32.45 48.9,32.15 C3.2 | v52.68,40 52.68,38.48 arc-90 52.65,38.45 | C4.2 57.75,35.6 | 40.2,18.95 R5.2 | R4.2 39.95,38.55 39.9,38.6 | 8.1,66.35 | 8.1,66.35 8.1,63.3 11.45,59.95 R7.2
  Bottom 0.3: R5.2 R6.2 40.25,24.35 40.25,25.55 C8.+ 40.35,26 41.1,26 41.25,26.15 41.25,30.2 39.95,31.5 | R4.2 R2.2 R3.2 39.95,31.5 | 39.95,31.5 39.95,30.55 39.15,29.75 39,29.75 38.85,29.6 38.85,29.45 38.4,29 37.2,29 | 49.35,12.63 DIGITAL_LDO.1 45.76,15.05 41.25,15.05 40.2,16.1 40.2,18.95 | 49.35,12.63 49.35,11.98 | 49.35,11.98 49.35,11.33 DIGITAL_LDO.3 48.18,11.3 46.95,11.3 46.95,5.15 44.82,5.15 | DIGITAL_LDO.2 49.35,11.98 | 49.35,12.63 51,12.63 C27.1 52.4,12.55 C28.+ 52.95,12.55 54.75,14.35 54.75,24.2 51.6,27.35 51.6,29.5 | 51.6,29.5 50.5,29.5 48.85,31.15 C3.2 | R37.1 19.59,10.36 R36.1 R35.1 34.21,10.39 34.65,9.95 34.65,9.5 35.85,8.3 35.85,5.15 38.72,5.15 | 38.72,5.15 44.82,5.15 | R13.1 38.72,5.15 | R11.1 44.82,5.15 | U$1.4 37.2,28.6 37.2,29 | 37.2,29 C7.2 | 51.6,29.5 52.6,30.5 53.25,30.5 C2.2 53.55,30.75 53.55,31.85 53.7,32 54.65,32 54.75,32.1 54.75,33.6 58.05,33.6 58.2,33.75 | C1.2 51.2,38.45 52.65,38.45 53.55,38.45 56.55,35.45 | 56.55,35.45 56.7,35.3 | C9.+ 54.45,41.75 56.7,41.75 58.8,39.65 58.8,36.05 58.2,35.45 v57.9,35.45 | v34.65,40.55 38.4,40.55 39.9,39.05 39.9,38.6 | v29.55,42.65 27.9,41 v19.05,41 | v57.9,35.45 56.55,35.45 | 58.2,35.15 v57.9,35.45 | v57.9,35.45 57.75,35.6 | 58.2,35.15 | 58.2,35.15 58.2,33.75 | 58.2,33.45 58.2,33.75
  Bottom 0.406: JP2.1 3.09,10.36 R37.1
VDD  (via drill 0.3)  (1 unrouted)
  Top 0.15: APWR.1 75.97,7.63 74.85,8.75 74.85,23.15 70.1,23.15 C15.1 | U1.13 61.2,29.44 v61.2,29.15
  Top 0.3: v61.2,29.15 61.65,29.15 63.3,27.5 70.05,27.5 70.5,27.05 C16.+ 70.5,23.55 70.1,23.55 70.1,23.15 | 69.88,23.37 arc90 C15.1 69.88,23.45 69.88,22.4 | ANALOG_LDO.2 69.23,22.4 | ANALOG_LDO.3 68.58,22.4 69.23,22.4 | ANALOG_LDO.1 69.88,22.4 | 69.88,22.4 69.23,22.4
  Bottom 0.15: 61.12,30.6 61.2,30.6 | 61.2,30.65 | 61.2,30.65 61.2,30.6 | 61.2,30.6 61.2,29.1 | 61.2,30.65 C11.1 61.16,30.64 61.2,30.6

## Text on the board
Top: Narsil | v0.6 | goron.dekar@gmail.com